# Allegro board mainBoard.brd
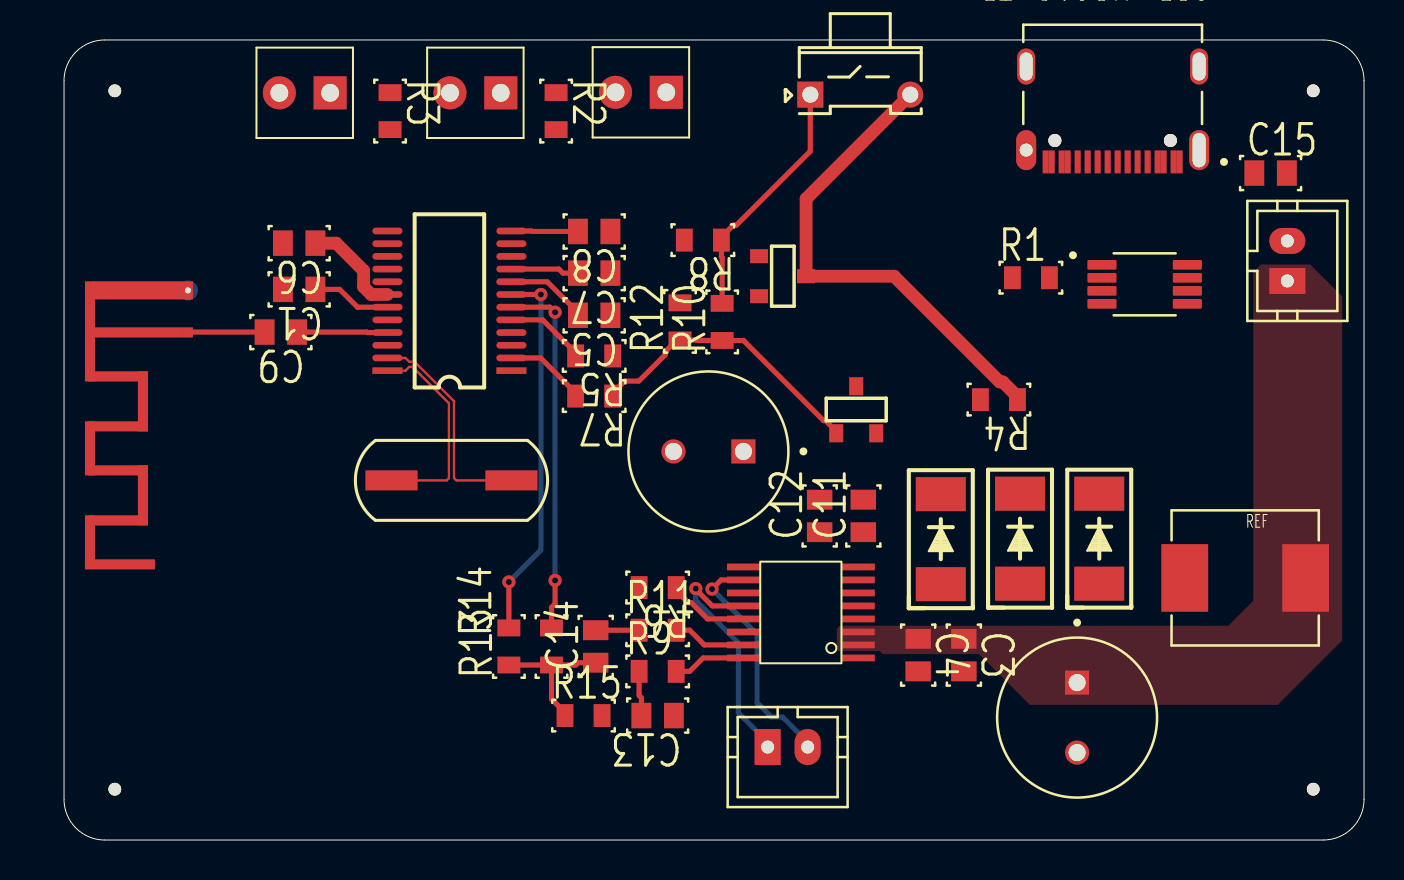
[diagram p0: board, top side]
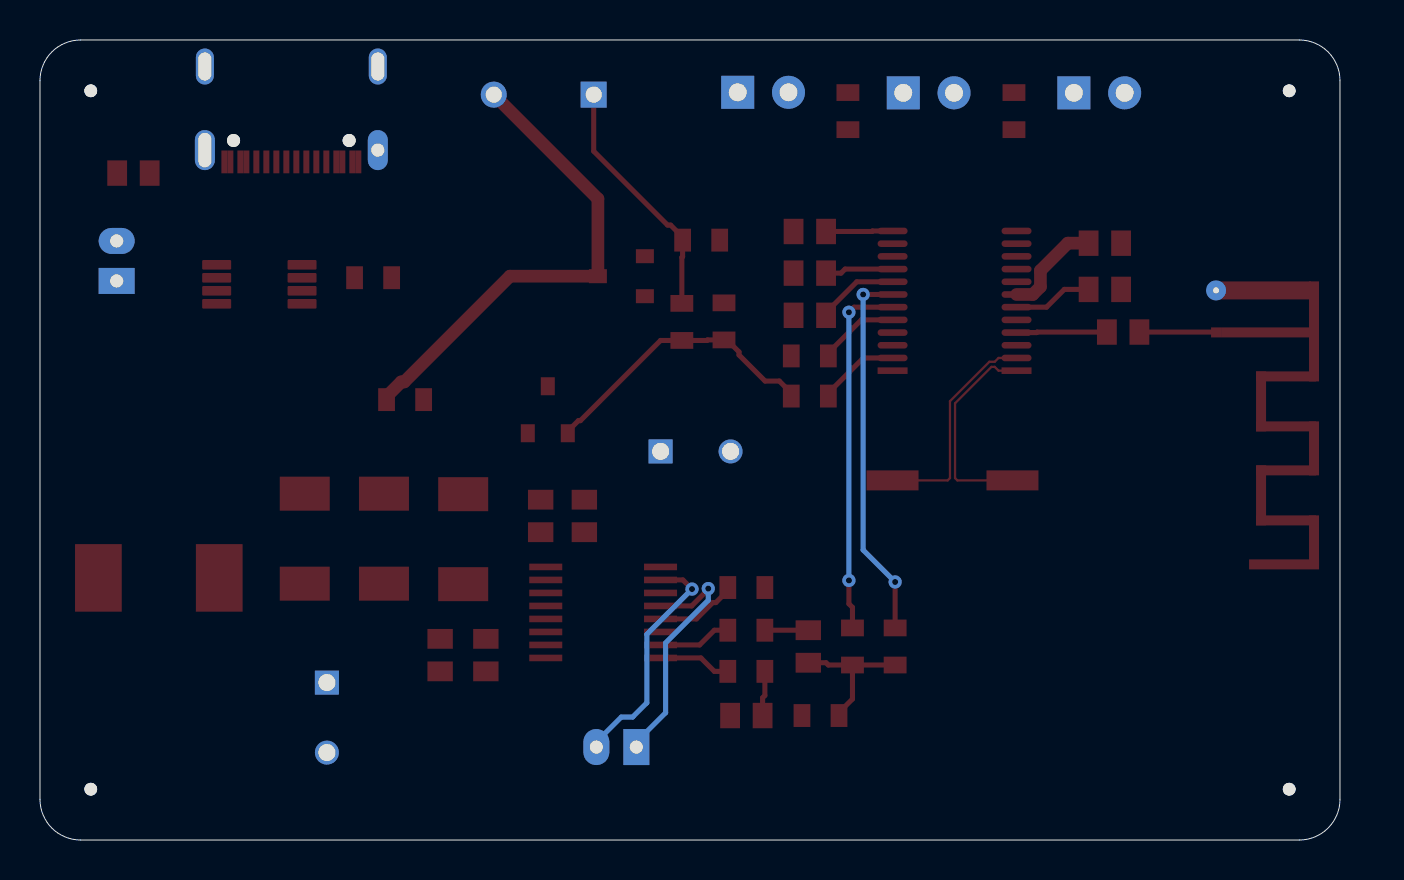
[diagram p1: board, bottom side, seen from below]

Outline 65.02 x 40.01 mm; copper layers: TOP, BOTTOM. Coordinates in mm from the lower left corner of the outline.
Outline path: 0,37.97 arc(0.6,39.41) 2.03,40.01 62.99,40.01 arc(64.43,39.41) 65.02,37.97 65.02,2.03 arc(64.43,0.6) 62.99,0 2.03,0 arc(0.6,0.6) 0,2.03 0,37.97

## Design rules (mm)
net group CLK: nets N06521 N06530
net group POWER: nets USB_V VMCU
net group USB: nets USB_DM USB_DP

## Placement (name value [footprint] x y rotation side)
ANT1  BT_ANT  [ANT]  6.2 27.48 90 top
C1  1 uF  [SC0805]  11.76 27.53 180 top
C2  470 uF  [CP_8X12]  50.67 6.12 270 top
C3  10 uF  [SC0805]  45.01 9.25 270 top
C4  1 uF  [SC0805]  42.72 9.25 270 top
C5  1 uF  [SC0805]  26.52 26.24 180 top
C6  1 uF  [SC0805]  11.76 29.84 180 top
C7  1 uF  [SC0805]  26.52 28.35 180 top
C8  1 uF  [SC0805]  26.52 30.43 180 top
C9  2.7 pF  [SC0805]  10.85 25.4 180 top
C10  470 uF  [CP_8X12]  32.23 19.43 180 top
C11  1 uF  [SC0805]  39.98 16.21 90 top
C12  10 uF  [SC0805]  37.8 16.21 90 top
C13  0.15 uF  [SC0805]  29.69 6.22 180 top
C14  0.15 uF  [SC0805]  26.59 9.68 90 top
C15  10 uF  [SC0805]  60.35 33.35 0 top
D1  STDBY  [LED_D3MM]  20.57 37.36 270 top
D2  CHRG  [LED_D3MM]  12.04 37.36 270 top
D3  PWR  [LED_D3MM]  28.85 37.39 270 top
D4  SS32  [SMA]  51.79 12.8 90 top
D5  SS32  [SMA]  47.83 12.8 90 top
D6  SS32  [SMA]  43.87 12.78 90 top
J1  BATTERY  [CON-PH-2-0]  61.19 28.96 90 top
J2  SPEAKER  [CON-PH-2-0]  36.2 4.65 0 top
J3  CSP-USC16-TR  [VALCON_CSP-USC16-TR]  52.45 33.91 180 top
L1  4.7 uH  [L_0630]  59.08 13.11 0 top
NOREF  -  [unnamed]  62.48 2.54 0 top
NOREF#2  -  [unnamed]  2.54 2.54 0 top
NOREF#3  -  [unnamed]  62.48 37.47 0 top
NOREF#4  -  [unnamed]  2.54 37.47 0 top
Q1  2301  [SOT23-PMOS]  36.02 28.19 270 top
Q2  9014  [SOT23-NPN]  39.62 21.59 0 top
R1  2 k  [SR0805]  48.36 28.12 0 top
R2  470  [SR0805]  24.61 36.45 270 top
R3  470  [SR0805]  16.31 36.45 270 top
R4  100 k  [SR0805]  46.76 22.02 180 top
R5  100  [SR0805]  26.52 24.21 180 top
R6  2.2 k  [SR0805]  29.69 12.62 180 top
R7  10 k  [SR0805]  26.52 22.2 180 top
R8  10 k  [SR0805]  31.95 30 180 top
R9  56 k  [SR0805]  29.69 8.43 0 top
R10  10 k  [SR0805]  32.92 25.91 90 top
R11  56 k  [SR0805]  29.69 10.49 0 top
R12  10 k  [SR0805]  30.81 25.93 90 top
R13  10 k  [SR0805]  22.25 9.68 90 top
R14  10 k  [SR0805]  24.38 9.68 90 top
R15  100 k  [SR0805]  25.98 6.22 0 top
SW1  PWR  [KEY2P_3X6-SMT]  39.83 37.97 0 top
U1  TP4056  [MSOP8]  54.05 27.79 0 top
U2  AC6905A  [QSOP24]  22.38 23.47 180 top
U3  CS8326C  [TSSOP16]  36.86 11.38 180 top
Y1  24 MHz  [M475S_2]  19.38 17.98 0 top

## Library data of the parts
ANT1 = BT_ANT
C1 C3-C9 C11-C15 = CAPACITOR NON-POL
C2 C10 = CP
D1-D3 = LED
D4-D6 = DIODE SCHOTTKY
J1 J2 = CON2
J3 = CSP-USC16-TR
L1 = INDUCTOR
Q1 = MOSFET P
Q2 = NPN BCE
R1-R15 = R2
SW1 = SW TACT-SPST
U1 = TP4056
U2 = AC6905A
U3 = CS8326C: Tolerance: ***; User Part Number: ***
Y1 = CRYSTAL

## Footprints (pads in the part's own frame, mm; a bottom-side part is the same pattern mirrored in y, then rotated)
ANT
  rect 0.5x3.5 smd: (-13.701,3.401)
  rect 2.499x0.5 smd: (-12.499,4.9)
  rect 0.5x3 smd: (-11.501,3.5) (-8.999,3.5) (-6.8,3.5) (-4.3,3.5)
  rect 3x0.5 smd: (-10.249,2.25) (-5.55,2.25)
  rect 2.7x0.5 smd: (-7.899,4.9)
  rect 0.5x4.501 smd: (-2.101,2.499)
  rect 5.001x0.5 smd: (-2.05,4.9)
  rect 0.899x4.501 smd: (0,2.499)
  rect 0.899x0.5 hole 0.3: 1(0,0)
  rect 0.5x0.5 smd: 2(-2.101,0)
CON-PH-2-0
  rect 1.3x1.8 hole 0.65: 1(-1,0)
  oval 1.3x1.8 hole 0.65: 2(1,0)
CP_8X12
  rect 1.2x1.2 hole 0.85: 1(-1.75,0)
  round 1.2 hole 0.85: 2(1.75,0)
KEY2P_3X6-SMT
  rect 1.3x1.3 hole 0.8: 1(-2.5,-0.7)
  round 1.3 hole 0.8: 2(2.5,-0.7)
L_0630
  rect 2.337x3.378 smd: 1(3.023,0) 2(-3.023,0)
LED_D3MM
  rect 1.651x1.651 hole 0.889: 1(0,1.27)
  round 1.651 hole 0.889: 2(0,-1.27)
M475S_2
  rect 2.601x1.001 smd: 1(-3,0) 2(3,0)
MSOP8
  custom 1.45x0.48 smd: 1(-2.135,0.975) 2(-2.135,0.325) 3(-2.135,-0.325) 4(-2.135,-0.975) 5(2.135,-0.975) 6(2.135,-0.325) 7(2.135,0.325) 8(2.135,0.975)
QSOP24
  rect 1.5x0.33 smd: 1(0,0) 24(6.2,0)
  oval 1.5x0.33 smd: 2(0,-0.635) 3(0,-1.27) 4(0,-1.905) 5(0,-2.54) 6(0,-3.175) 7(0,-3.81) 8(0,-4.445) 9(0,-5.08) 10(0,-5.715) 11(0,-6.35) 12(0,-6.985) 13(6.2,-6.985) 14(6.2,-6.35) 15(6.2,-5.715) 16(6.2,-5.08) 17(6.2,-4.445) 18(6.2,-3.81) 19(6.2,-3.175) 20(6.2,-2.54) 21(6.2,-1.905) 22(6.2,-1.27) 23(6.2,-0.635)
SC0805
  rect 0.991x1.27 smd: 1(-0.813,0) 2(0.813,0)
SMA
  rect 1.7x2.5 smd: 1(0.017,0.01) 2(4.517,0.01)
SOT23-NPN
  rect 0.7x0.9 smd: 1(-1,-1.25) 2(1,-1.25) 3(0,1.1)
SOT23-PMOS
  rect 0.7x0.9 smd: 1(-1,-1.25) 2(0,1.1) 3(1,-1.25)
SR0805
  rect 0.838x1.143 smd: 1(-0.927,0) 2(0.927,0)
TSSOP16
  rect 1.651x0.33 smd: 1(-2.87,2.276) 2(-2.87,1.626) 3(-2.87,0.975) 4(-2.87,0.325) 5(-2.87,-0.325) 6(-2.87,-0.975) 7(-2.87,-1.626) 8(-2.87,-2.276) 9(2.87,-2.276) 10(2.87,-1.626) 11(2.87,-0.975) 12(2.87,-0.325) 13(2.87,0.325) 14(2.87,0.975) 15(2.87,1.626) 16(2.87,2.276)
unnamed
  round 0.635 hole 3.175 unplated: (0,0)
VALCON_CSP-USC16-TR
  round 0.65 hole 0.65 unplated: (-2.89,-1.07) (2.89,-1.07)
  rect 0.3x1.14 smd: A1(-3.35,0) A4(-2.55,0) A5(-1.25,0) A6(-0.25,0) A7(0.25,0) A8(1.25,0) A9(2.55,0) A12(3.35,0) B1(3.05,0) B4(2.25,0) B5(1.75,0) B6(0.75,0) B7(-0.75,0) B8(-1.75,0) B9(-2.25,0) B12(-3.05,0)
  oval 1x2 hole 0.65x1.72: S1(-4.325,-0.59)
  oval 1x2 hole 0.65: S2(4.325,-0.59)
  oval 0.9x1.8 hole 0.65x1.4: S3(-4.325,-4.77) S4(4.325,-4.77)

## Nets
GND: ANT1.1(W1) C1.2 C2.2 C3.2 C4.2 C5.1 C6.2 C7.1 C8.1 C10.2 C11.1 C12.1 C13.1 C15.2 D3.1(CATHODE) J1.2 J3.A1(GND_A#A1) J3.A12(GND_A#A12) J3.B1(GND_B#B1) J3.B12(GND_B#B12) J3.S1(SHELL_GND#S1) J3.S2(SHELL_GND#S2) J3.S3(SHELL_GND#S3) J3.S4(SHELL_GND#S4) Q2.3(E) R1.1 R6.2 R12.2 R15.2 U1.1(TEMP) U1.3(GND) U2.11(DACVSS) U2.17(VSSIO) U2.20(AVSS2) U2.22(AVSS1) U3.1(GND1) U3.4(GND4) U3.7(GND7) U3.8(GND8) U3.11(PGND)
PVDD: C10.1 C11.2 C12.2 D4.2(CATHODE) D5.2(CATHODE) D6.2(CATHODE) U3.9(PVDD)
AMP_ABD: C8.2 U2.12(VDDIO) U3.14(ABD)
AMP_INN: R9.2 U3.16(INN)
AMP_INP: R11.2 U3.15(INP)
AMP_SD: R6.1 U2.16(ADC8/PB9) U3.13(SD)
BATT: C2.1 C3.1 C4.1 J1.1 L1.1 Q1.2(DRAIN) R4.1 SW1.2 U1.5(BAT) U3.2(VIN2) U3.3(VIN3)
BT_ANT: C9.1 U2.21(BT_RF)
BUTTON_SIGNAL: R8.2 U2.1(PC5/SD1CLK)
DAC_L: R13.2 U2.7(DACL)
DAC_R: R14.2 U2.6(DACR)
LED: R5.2 U2.5(PB13/MIC/PA3/AUX1L)
LED_CHRG: R3.2 U1.7(CHRG)
LED_STDBY: R2.2 U1.6(STDBY)
OUTN: J2.2 U3.10(OUTN)
OUTP: J2.1 U3.12(OUTP)
POWER_UP: R7.2 U2.2(PC4/SD1CMD)
USB_DM: J3.A7(DN1) J3.B7(DN2) U2.3(USBDM/PC3/SD0DAT)
USB_DP: J3.A6(DP1) J3.B6(DP2) U2.4(USBDP/PA4/AUX1R)
USB_V: C15.1 D1.2(ANODE) D2.2(ANODE) J3.A4(VBUS_A#A4) J3.A9(VBUS_A#A9) J3.B4(VBUS_B#B4) J3.B9(VBUS_B#B9) U1.4(VCC) U1.8(CE)
VMCU: C6.1 Q1.3(SOURCE) U2.18(LDO_IN)
N00539: R1.2 U1.2(PROG)
N02995: D4.1(ANODE) D5.1(ANODE) D6.1(ANODE) L1.2 U3.5(LX5) U3.6(LX6)
N04560: C13.2 R9.1
N04850: C14.2 R11.1
N05004: C14.1 R13.1 R14.1 R15.1
N06521: U2.24(BT_OSCO) Y1.1
N06530: U2.23(BT_OSC) Y1.2
N06693: C5.2 U2.8(DACVDD)
N06765: C7.2 U2.9(VCOM)
N07568: C1.1 U2.19(BT_AVDD)
N08299: R8.1 R10.2 SW1.1
N08455: Q2.1(B) R7.1 R10.1 R12.1
N08674: Q1.1(GATE) Q2.2(C) R4.2
N011291: D1.1(CATHODE) R2.1
N011451: D2.1(CATHODE) R3.1
N15505: ANT1.2(W2) C9.2
N116950: D3.2(ANODE) R5.1

Pads without a net: J3 A5 A8 B5 B8; U2 10 13 14 15

## Via types
v1: diameter 0.66, hole 0.305, TOP to BOTTOM, 6 vias

## Routing (per net, layer and track width the routed paths; a pad name or vN(x,y) marks a point on that pad's centre or on a via; arc(x,y) is an arc through that point)
AMP_ABD: length 3.3
  TOP w0.254: U2.12 23.38,30.45 23.41,30.43 C8.2
AMP_INN: length 3.6
  TOP w0.254: R9.2 31.29,8.43 31.96,9.1 U3.16
AMP_INP: length 3.7
  TOP w0.254: U3.15 32.03,9.75 31.29,10.49 R11.2
AMP_SD: length 4.1
  TOP w0.254: U3.13 32.19,11.05 31.37,11.87 31.22,11.87 30.62,12.47 R6.1
BATT: length 24.5
  TOP w0.635: R4.1 47.69,22.17 46.95,22.91 46.8,22.91 41.52,28.19 Q1.2 37.12,32.06 SW1.2
BT_ANT: length 4.5
  TOP w0.254: U2.21 15.17,25.37 15.15,25.4 C9.1
DAC_L: length 18.8
  TOP w0.254: v1(23.85,27.28) U2.7 ; v1(22.25,12.9) R13.2
  BOTTOM w0.254: v1(22.25,12.9) 23.85,14.5 v1(23.85,27.28)
DAC_R: length 18.1
  TOP w0.254: v1(24.56,12.98) 24.56,11.81 24.38,11.63 R14.2 ; U2.6 24.31,26.64 v1(24.56,26.39)
  BOTTOM w0.254: v1(24.56,26.39) v1(24.56,12.98)
LED: length 4
  TOP w0.254: R5.2 25.59,24.36 23.94,26.01 U2.5
OUTN: length 12
  TOP w0.254: U3.10 32.87,13 v1(32.41,12.55)
  BOTTOM w0.254: v1(32.41,12.55) 34.67,10.29 34.67,6.86 35.38,6.15 35.95,6.15 37.19,4.9 J2.2
OUTP: length 12.2
  TOP w0.254: v1(31.6,12.57) 31.6,12.53 32.43,11.7 U3.12
  BOTTOM w0.254: J2.1 35.2,4.9 33.73,6.36 33.73,9.86 31.6,11.99 v1(31.6,12.57)
POWER_UP: length 4.1
  TOP w0.254: U2.2 23.84,24.1 25.59,22.35 R7.2
VMCU: length 5.1
  TOP w0.635: U2.18 15.37,27.28 14.98,27.66 14.98,28.47 13.61,29.84 C6.1
N04560: length 2.3
  TOP w0.254: C13.2 28.88,7.11 28.77,7.23 R9.1
N04850: length 2.2
  TOP w0.254: R11.1 C14.2
N05004: length 7.2
  TOP w0.254: R14.1 R13.1 ; R14.1 25.59,8.75 25.7,8.86 C14.1 ; R14.1 24.38,7.05 25.06,6.38 R15.1
N06521: length 10.6
  TOP w0.114: Y1.1 19.14,17.98 19.25,18.1 19.25,21.84 17.43,23.66 17.27,23.66 17.08,23.47 U2.24
N06530: length 11
  TOP w0.114: Y1.2 19.62,17.98 19.51,18.1 19.51,21.94 17.54,23.91 17.27,23.91 17.08,24.1 U2.23
N06693: length 4.1
  TOP w0.254: U2.8 24.17,27.91 25.7,26.38 C5.2
N06765: length 3.4
  TOP w0.254: U2.9 24.75,28.55 24.96,28.35 C7.2
N07568: length 4
  TOP w0.254: C1.1 13.79,27.53 14.68,26.64 U2.19
N08299: length 12.4
  TOP w0.254: R10.2 32.92,29.13 32.88,29.17 R8.1 32.88,30.15 33.48,30.75 33.63,30.75 37.33,34.44 SW1.1
N08455: length 14.5
  TOP w0.254: Q2.1 38.62,20.44 38.09,20.97 37.99,20.97 33.98,24.98 R10.1 31.66,24.98 31.64,25.01 R12.1 30.66,25.01 30.06,24.41 30.06,24.25 28.75,22.95 28.04,22.95 27.44,22.35 R7.1
N15505: length 3.8
  TOP w0.254: ANT1.2 6.22,25.4 10.03,25.4

## Copper pours and planes (outline as drawn; the poured copper is in the pictures)
BATT on TOP: 59.87,28.78 62.33,28.78 63.93,27.18 63.93,9.98 60.71,6.76 48.31,6.76 45.77,9.3 40.94,9.3 40.79,9.45 38.73,9.45 38.66,9.53 38.66,10.57 38.81,10.72 58.24,10.72 59.49,11.96 59.49,28.4
